# Altium PCB BaseStation.PcbDoc (part 2 of 2)
Units mil, origin at the board's own origin, x right, y up, seen from the top; angles counter-clockwise.
Board outline 2500 x 2500 mil, 4 copper layers (Component Side, Ground Plane, Power Plane, Solder Side), stack 60.8 mil thick; 157 components, 102 nets, 605 pads, 408 vias.
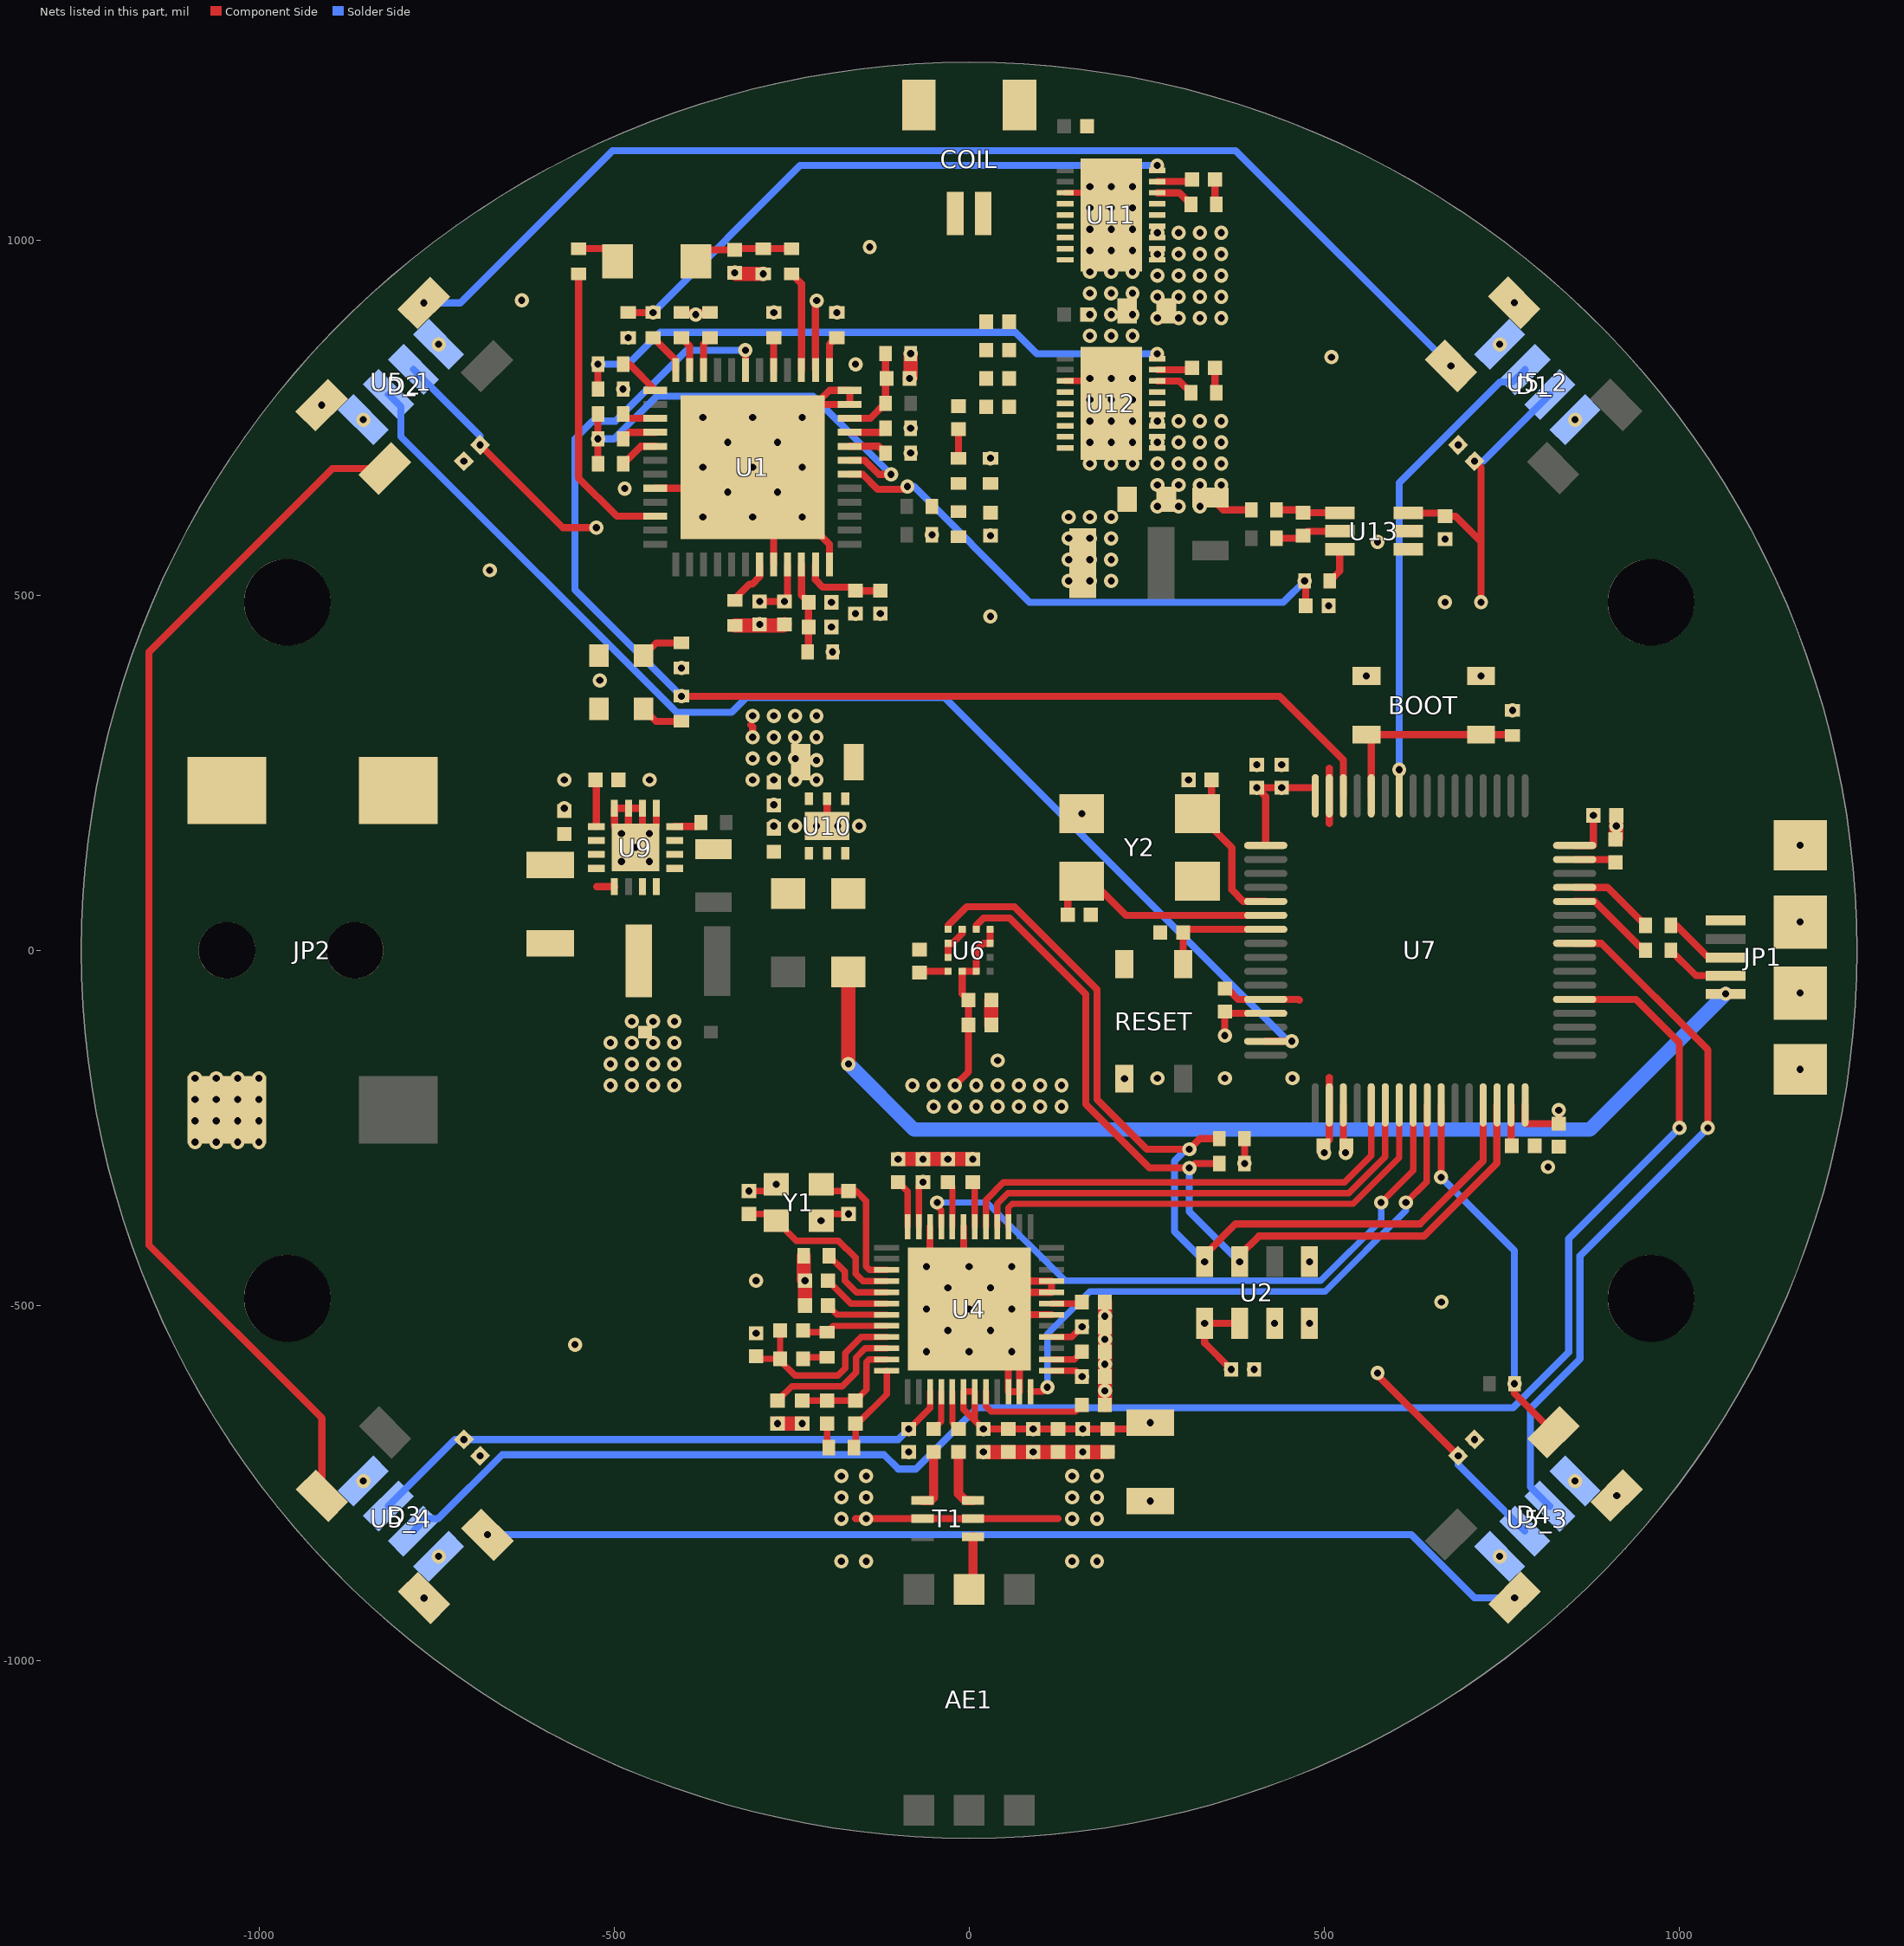
[diagram p4: the nets of this part, all layers, seen from the top]

## Via types
v1: diameter 20, hole 10, Component Side to Solder Side, 408 vias

## Nets (pads, with @x,y where several pads share a name; then routed paths per layer and width w, separated by ;. In a path a pad name is that pad's centre, name@x,y a point inside that pad or via, vN(x,y) a via of type N, cw(c..) or ccw(c..) an arc to the next point about the centre after c; other vN are vias at no path point) (continued)
GND: C1.1 C14.1 C15.2 C16.2 C17.1 C18.1 C19.2 C22.1 C23.1 C24.1 C25.1 C26.1 C27.1 C31.1 C33.1 C34.1 C35.1 C36.1 C37.1 C38.1 C39.1 C40.1 C41.1 C42.1 C43.1 C44_1.1 C44_2.1 C44_3.1 C44_4.1 C45.1 C46.1 C47.1 C48.1 C49.2 C50.2 C51.1 C52.1 C53.1 C54.1 C55.1 C56.1 C57.1 C58.1 C59.1 C60.1 C61.1 C62.1 C63.1 C64.1 C65.2 C69.1 C70.1 C71.1 C73.1 C74.1 C75.1 C79.1 C81.1 C82.2 C84.1 C85.2 C86.2 C87.1 C88.1 COIL.0 D1.3 D2.3 D3.3 D4.3 D9.2 JP1.GND JP1.MT1 JP1.MT2 JP1.P$1 JP1.P$2 JP2.0 JP2.2 pad.0 pad.1 pad.2 pad.3 PWR.C R3.1 R10.1 R21.1 R27.1 R28.2 R29.1 R30.2 R34.2 R39.1 R40.1 R44.1 RESET.3 RESET.4 T1.2 T1.5 U1.20 U1.32 U1.36 U1.47 U1.48 U1.49 U2.3 U2.4 U2.5 U4.22 U4.23 U4.30 U4.32 U4.33 U4.43 U4.46 U4.49 U5_1.1 U5_1.4 U5_2.1 U5_2.4 U5_3.1 U5_3.4 U5_4.1 U5_4.4 U6.2 U6.3 U6.12 U7.12 U7.18 U7.63 U9.5 U9.6 U9.7 U9.8 U9.15 U9.16 U9.17@-469.88,144.84 U10.2 U10.6 U10.7@-200,175 U11.3 U11.9 U12.3 U12.9 U13.1 U13.2 WRLS.C Y1.2 Y2.2 | length 3508.2
  Component Side w9: v1(-310,-338.86) -280.95,-338.86 v1(-271.5,-329.41) ; v1(-208.5,-380.59) -199.05,-371.14 v1(-170,-371.14) ; U4.49@-7.87,-499.21 U4.49@7.87,-514.96 ; U4.49@23.62,-483.46 25.71,-481.38 U4.49@39.37,-467.72 ; U4.49@55.12,-562.2 U4.49@70.87,-577.95 ; U12.3@135.24,801.5 168.5,801.5 U12.9@200,770 ; U11.3@135.24,1066.5 168.5,1066.5 U11.9@200,1035
  Component Side w10: U1.20@-441.81,650.47 -334.53,650.47 U1.49@-306.04,678.96 ; U9.5@-440.35,199.96 -440.35,174.37 v1(-450.2,164.53) U9.17@-460.04,154.69 ; U1.49@-312.87,685.79 U1.49@-306.04,678.96 ; U1.49@-297.13,670.04 U1.49@-306.04,678.96 ; U1.49@-281.38,701.54 U1.49@-265.63,717.28 ; U1.32@-275.47,543.19 U1.49@-275.47,650.47 ; U10.7@-200,175 U10.2@-200,213.39 ; U1.36@-196.73,543.19 -196.73,571.73 v1(-235,610) v1(-270,645) U1.49@-275.47,650.47 ; -160,-800 v1(-145,-800) T1.5@-65.43,-800 T1.2@5.43,-800 125,-800 ; U4.46@-55.12,-388.86 -55.12,-449.88 v1(-30,-475) U4.49@-7.87,-497.13 ; U6.3@-29.53,-9.84 U6.2@-29.53,9.84 -23.81,9.84 -9.84,23.81 U6.12@-9.84,29.53 ; U4.43@-7.87,-388.86 U4.49@-7.87,-497.13 ; U4.49@70.87,-577.95 U4.23@70.87,-621.14 U4.22@55.12,-621.14 55.12,-562.2 55.12,-560.12 v1(30,-535) U4.49@7.87,-512.87 ; U4.30@116.14,-512.87 U4.49@7.87,-512.87 ; C48.1@360,-53.86 363.35,-53.86 378.39,-68.9 U7.12@417.48,-68.9 463.9,-68.9 465,-70 ; C52.1@498.86,-275 507.05,-266.81 U7.18@507.05,-217.52 507.05,-178.75 ; 507.05,178.75 U7.63@507.05,217.52 507.05,256.28 ; U9.17@-479.72,154.69 U9.7@-479.72,199.96 ; U9.17@-479.72,154.69 v1(-489.57,164.53) -499.41,174.37 U9.8@-499.41,199.96 U9.7@-479.72,199.96 ; U9.17@-479.72,154.69 v1(-469.88,144.84) U9.17@-460.04,154.69 ; U9.7@-479.72,199.96 U9.6@-460.04,199.96 U9.17@-460.04,154.69 ; U1.49@-306.04,678.96 v1(-305,680) ; v1(-305,680) U1.49@-275.47,650.47 ; v1(-305,680) v1(-270,715) v1(-235,750) U1.49@-216.42,768.58 ; U1.49@-216.42,768.58 U1.47@-168.19,768.58 U1.48@-168.19,788.27 -196.73,788.27 U1.49@-216.42,768.58 ; U4.49@-7.87,-497.13 v1(0,-505) ; v1(0,-505) U4.49@23.62,-481.38 ; v1(0,-505) U4.49@7.87,-512.87 ; U4.49@23.62,-481.38 25.71,-481.38 U4.32@116.14,-481.38 U4.33@116.14,-465.63 39.37,-465.63 v1(30,-475) U4.49@23.62,-481.38
  Component Side w20: R29.1@-330,457.28 -261.57,457.28 C84.1@-260,458.86 ; v1(-330,953.86) -328.43,952.28 v1(-290,952.28) ; v1(-270,-666.14) v1(-235,-666.14) ; R3.1@-232.72,-430 -232.72,-463.43 v1(-231.14,-465) C24.1@-231.14,-500 ; v1(-100,-293.86) v1(-65,-293.86) v1(-30,-293.86) v1(5,-293.86) ; v1(-83.86,805) -82.28,806.57 v1(-82.28,840) ; v1(20,-706.14) C35.1@55,-706.14 v1(90,-706.14) C37.1@125,-706.14 v1(160,-706.14) C39.1@195,-706.14 ; C47.1@31.14,-105 C46.1@31.14,-70 ; C31.1@191.14,-640 v1(191.14,-620) C43.1@191.14,-600 v1(191.14,-582.5) C22.1@191.14,-565 v1(191.14,-547.5) C42.1@191.14,-530 v1(191.14,-515) C19.2@191.14,-495 ; C56.1@910,156.14 911.14,157.28 v1(911.14,175) C55.1@911.14,190
  other v1: -767.42,-911.67 -180,-860 -145,-860 145,-860 180,-860 -746.97,-853.03 746.97,-853.03 -180,-800 145,-800 180,-800 255,-775.12 -180,-770 -145,-770 145,-770 180,-770 911.67,-767.42 -853.03,-746.97 853.03,-746.97 -180,-740 -145,-740 145,-740 180,-740 -688.59,-711.41 -85,-706.14 711.41,-688.59 401.14,-590 -60,-565 0,-565 60,-565 -555,-555 -300,-539.04 -30,-535 430,-525 479.21,-525 -60,-505 60,-505 665,-495 -300,-465 -60,-445 0,-445 60,-445 479.21,-438.39 815,-305 500,-285 -1090,-270 -1060,-270 -1030,-270 -1000,-270 -1090,-240 -1060,-240 -1030,-240 -1000,-240 -1090,-210 -1060,-210 -1030,-210 -1000,-210 -505,-190 -475,-190 -445,-190 -415,-190 -80,-190 218.66,-180.71 -1090,-180 -1060,-180 -1030,-180 -1000,-180 265,-180 360,-180 455,-180 1170,-167.48 -505,-160 -475,-160 -445,-160 -415,-160 40,-155 -505,-130 -475,-130 -445,-130 -415,-130 -475,-100 -445,-100 -415,-100 1170,-60 1170,40 -489.57,125.16 -450.2,125.16 1170,148 -275,175 -245,175 -215,175 -185,175 -155,175 158.5,192.5 -570,200 -275,205 -570,240 -450,240 308.86,240 405,261.14 440,261.14 765,337.72 -520,380 -193.86,455 -295,458.86 30,470 -125,473.86 506.14,485 -193.86,490 670,490 140,520 170,520 200,520 -675,535 140,550 170,550 200,550 575,575 670,578.86 140,580 170,580 200,580 30,583.86 -52.28,585 -375,610 -305,610 140,610 170,610 200,610 -340,645 -485,650 -375,680 -235,680 170,685 200,685 230,685 -711.41,688.59 -82.28,700 688.59,711.41 -340,715 170,715 200,715 230,715 170,745 200,745 230,745 -853.03,746.97 853.03,746.97 -375,750 -305,750 -911.67,767.42 170,775 200,775 230,775 -487.28,790 170,805 200,805 230,805 -160,825 510,835 -746.97,853.03 746.97,853.03 -480,862.28 170,865 200,865 230,865 170,895 200,895 230,895 -186.17,897.72 767.42,911.67 -630,915 170,925 200,925 230,925 170,955 200,955 230,955 170,985 200,985 230,985 -140,990 170,1015 200,1015 230,1015 170,1045 200,1045 230,1045 170,1075 200,1075 230,1075
I2C.SCL: R6.1 U2.8 U6.1 U7.29 | length 1359.7
  Component Side w10: U6.1@-29.53,29.53 -29.53,35.24 -3.24,61.53 63.47,61.53 180,-55 180,-210 250,-280 v1(310,-280) 325,-265 R6.1@352.28,-265 ; v1(331.57,-438.39) 331.57,-428.43 375,-385 635,-385 723.58,-296.42 U7.29@723.58,-217.52
  Solder Side w10: v1(310,-280) 305.7,-280 289,-296.7 289,-395.81 v1(331.57,-438.39)
I2C.SDA: R7.1 U2.7 U6.11 U7.30 | length 1261.9
  Component Side w10: U6.11@9.84,29.53 9.84,35.24 13.6,39 20.13,45.53 56.84,45.53 164,-61.63 164,-216.63 253.69,-306.31 v1(310,-306.31) v1@311.69,-306.31 ; v1@313.38,-306.31 v1@311.69,-306.31 ; R7.1@352.28,-300 318.01,-300 v1@311.69,-306.31 ; v1(380.79,-438.39) 380.79,-429.21 407.74,-402.26 640.36,-402.26 743.02,-299.61 743.02,-217.77 U7.30@743.27,-217.52
  Solder Side w10: v1(310,-306.31) 310,-367.6 v1(380.79,-438.39)
ISENSE: C69.2 R14.2 U1.42 | length 766.5
  Component Side w10: U1.42@-168.19,670.16 -150.04,670.16 -128.88,649 -91,649 v1(-87,653) ; v1(472.28,520) 473.86,518.43 C69.2@473.86,485
  Solder Side w10: v1(-87,653) -78,653 85,490 442.28,490 v1(472.28,520)
NetAE1_1: AE1.1 T1.1 | length 76.1
  Component Side w13: AE1.1@0,-899.49 5.43,-894.06 T1.1@5.43,-825.59
NetBOOT_1: BOOT.1 BOOT.2 R10.2 U7.60 | length 297.2
  Component Side w10: BOOT.2@557.91,302.28 BOOT.2@559.29,303.66 ; U7.60@566.1,217.52 566.1,296.85 BOOT.2@559.29,303.66 ; R10.2@765,302.28 760,302.28 758.62,303.66 BOOT.1@720.71,303.66 BOOT.2@559.29,303.66
NetC14_2: C14.2 U4.44 | length 65.4
  Component Side w9: C14.2@-30,-326.14 -23.62,-332.52 U4.44@-23.62,-388.86
NetC15_1: C15.1 U4.42 | length 65.7
  Component Side w9: C15.1@5,-326.14 2.87,-328.27 7.87,-333.27 U4.42@7.87,-388.86
NetC16_1: C16.1 U4.48 | length 68.3
  Component Side w9: C16.1@-100,-326.14 -86.61,-339.53 U4.48@-86.61,-388.86
NetC17_2: C17.2 U4.4 Y1.1 | length 246
  Component Side w9: C17.2@-310,-371.14 -280.95,-371.14 Y1.1@-271.5,-380.59 -243.41,-408.67 -184.08,-408.67 -160,-432.75 -160,-455 -149.37,-465.63 U4.4@-116.14,-465.63
NetC18_2: C18.2 U4.3 Y1.3 | length 196.3
  Component Side w9: Y1.3@-208.5,-329.41 -199.05,-338.86 C18.2@-170,-338.86 -158.87,-338.86 -145,-352.73 -145,-445 -140.12,-449.88 U4.3@-116.14,-449.88
NetC19_1: C19.1 U4.31 | length 43.6
  Component Side w9: U4.31@116.14,-497.13 156.73,-497.13 C19.1@158.86,-495
NetC20_1: C20.1 C21.1 C25.2 U4.9 | length 271.6
  Component Side w9: C25.2@-300,-571.14 -296.14,-575 C20.1@-266.14,-575 ; C21.1@-266.14,-535 C20.1@-266.14,-575 ; U4.9@-116.14,-544.37 -151.8,-544.37 -174.36,-566.93 -174.36,-588.15 -184.73,-598.52 -245.27,-598.52 -266.14,-577.64 C20.1@-266.14,-575
NetC20_2: C20.2 R2.1 | length 34.8
  Component Side w9: C20.2@-233.86,-575 -231.57,-572.72 R2.1@-200,-572.72
NetC21_2: C21.2 R2.2 U4.8 | length 122.3
  Component Side w9: C21.2@-233.86,-535 -231.57,-537.28 R2.2@-200,-537.28 -191.34,-528.62 U4.8@-116.14,-528.62
NetC22_2: C22.2 U4.26 | length 47.2
  Component Side w9: U4.26@116.14,-575.87 147.99,-575.87 C22.2@158.86,-565
NetC23_2: C23.2 U4.6 | length 96
  Component Side w9: C23.2@-198.86,-465 -166.73,-497.13 U4.6@-116.14,-497.13
NetC24_2: C24.2 U4.7 | length 88
  Component Side w9: C24.2@-198.86,-500 -185.98,-512.87 U4.7@-116.14,-512.87
NetC26_2: C26.2 U4.10 | length 196.8
  Component Side w9: C26.2@-270,-633.86 -249.66,-613.52 -178.52,-613.52 -159.36,-594.36 -159.36,-573.15 -146.33,-560.12 U4.10@-116.14,-560.12
NetC27_2: C27.2 C28.2 C29.2 U4.11 | length 165.6
  Component Side w9: C27.2@-235,-633.86 C28.2@-200,-633.86 C29.2@-160,-633.86 -144.36,-618.22 -144.36,-579.36 -140.87,-575.87 U4.11@-116.14,-575.87
NetC28_1: C28.1 R4.1 | length 34.8
  Component Side w9: C28.1@-200,-666.14 -200,-697.72 R4.1@-197.72,-700
NetC29_1: C29.1 R4.2 U4.12 | length 129
  Component Side w9: R4.2@-162.28,-700 -160,-697.72 C29.1@-160,-666.14 -157.36,-666.14 -116.14,-624.93 U4.12@-116.14,-591.61
NetC30_1: C30.1 T1.4 | length 81.1
  Component Side w13: T1.4@-65.43,-774.41 -54.41,-774.41 -50,-770 C30.1@-50,-706.14
NetC30_2: C30.2 U4.16 | length 57.1
  Component Side w8.7: C30.2@-50,-673.86 -39.37,-663.23 U4.16@-39.37,-621.14
NetC31_2: C31.2 U4.20 | length 163
  Component Side w9: U4.20@23.62,-621.14 23.62,-641.9 31.08,-649.36 149.5,-649.36 C31.2@158.86,-640
NetC32_1: C32.1 T1.3 | length 83.2
  Component Side w13: C32.1@-15,-706.14 -15,-765 -5.59,-774.41 T1.3@5.43,-774.41
NetC32_2: C32.2 U4.17 | length 56.3
  Component Side w8.7: U4.17@-23.62,-621.14 -23.62,-665.24 C32.2@-15,-673.86
NetC45_2: C45.2 U6.4 | length 41.1
  Component Side w10: C45.2@-70,-31.14 -68.39,-29.53 U6.4@-29.53,-29.53
NetC49_1: C49.1 U7.5 Y2.3 | length 237.4
  Component Side w10: C49.1@341.14,240 341.14,212.14 Y2.3@321.5,192.5 370,144 370,85 386.1,68.9 U7.5@417.48,68.9
NetC50_1: C50.1 U7.6 Y2.1 | length 334.6
  Component Side w10: C50.1@138.86,50 138.86,77.86 Y2.1@158.5,97.5 172.5,97.5 220.79,49.21 U7.6@417.48,49.21
NetC56_2: C56.2 U7.47 | length 59.2
  Component Side w10: U7.47@852.52,127.95 905.91,127.95 C56.2@910,123.86
NetC57_2: C57.2 U7.31 | length 57.9
  Component Side w10: U7.31@762.95,-217.52 762.95,-274.09 C57.2@763.86,-275
NetC58_2: C58.2 RESET.1 U7.7 | length 162.6
  Component Side w10: RESET.1@301.34,-19.29 301.14,-19.09 C58.2@301.14,25 305.67,29.53 U7.7@417.48,29.53
NetC62_2: C62.2 U9.9 | length 66.1
  Component Side w10: C62.2@-526.14,240 -525,238.86 U9.9@-525,174.37
NetC63_2: C63.2 D10.1 D11.1 U10.4 U10.5
NetC66_1: C66.1 R15.2 | length 35.7
  Component Side w10: C66.1@346.14,1085 346.14,1051.57 R15.2@347.72,1050
NetC66_2: C66.2 U11.7 | length 50.2
  Component Side w10: U11.7@264.76,1082.24 311.1,1082.24 C66.2@313.86,1085
NetC67_1: C67.1 U12.7 | length 50.2
  Component Side w10: U12.7@264.76,817.24 311.1,817.24 C67.1@313.86,820
NetC67_2: C67.2 R16.1 | length 35.7
  Component Side w10: C67.2@346.14,820 346.14,786.57 R16.1@347.72,785
NetC68_1: C68.1 R18.2 U13.4 | length 90.9
  Component Side w10: R18.2@432.72,620 466.14,620 C68.1@470,616.14 521.22,616.14 U13.4@521.77,615.59
NetC68_2: C68.2 R13.2 U13.5 | length 93.2
  Component Side w10: R13.2@432.72,580 466.14,580 C68.2@470,583.86 476.14,590 U13.5@521.77,590
NetC72_1: C72.1 C76.1 C77.1 C78.1 C80.2 COIL.2
NetC72_2: C72.2 C76.2 C77.2 C78.2 U12.4
NetC74_2: C74.2 C75.2 R17.1 R18.1 U11.5 U12.5 | length 64.5
  Component Side w10: R17.1@340,637.4 357.4,620 R18.1@397.28,620
  other v1: 265,625 295,625 325,625 265,655 295,655 325,655 355,655 265,685 295,685 325,685 355,685 265,715 295,715 325,715 355,715 265,745 295,745 325,745 355,745 265,890 295,890 325,890 355,890 265,920 295,920 325,920 355,920 265,950 295,950 325,950 355,950 265,980 295,980 325,980 355,980 265,1010 295,1010 325,1010 355,1010
NetC79_2: C79.2 D13.1 R20.1 R21.2 | length 142.2
  Component Side w10: D13.1@-384.88,970 -368.74,986.14 C79.2@-330,986.14 -328.43,987.72 R21.2@-290,987.72 R20.1@-250,987.72
NetC80_1: C80.1 R23.2 | length 41.1
  Component Side w10: R23.2@-15,692.72 C80.1@-15,733.86
NetC82_1: C82.1 C85.1 R22.2 U1.34 | length 128
  Component Side w10: U1.34@-236.1,543.19 -236.1,499.96 C85.1@-226.14,490 C82.1@-226.14,455 -226.14,421.57 R22.2@-227.72,420
NetC83_1: C83.1 C86.1 U1.35 | length 120.2
  Component Side w10: U1.35@-216.42,543.19 -216.42,521.42 -206.24,511.24 -165.09,511.24 C83.1@-160,506.14 ; C83.1@-160,506.78 C83.1@-160,506.14 ; C86.1@-125,506.14 C83.1@-160,506.14
NetC87_2: C87.2 R23.1 R24.1 R25.2 R27.2
NetC88_2: C88.2 R33.2 R34.1 U1.46 | length 129.2
  Component Side w10: U1.46@-168.19,748.9 -139.06,748.9 -117.96,770 R33.2@-117.72,770 R34.1@-117.72,840
NetD1_4: D1.4 D2.2 | length 1672
  Solder Side w8: 670,830 677.42,822.58 v1(678.33,822.58)
  Solder Side w10: v1(-767.8,911.28) -716.76,911.28 -502.28,1125.76 375.14,1125.76 v1(678.33,822.58)
NetD2_4: D2.4 D3.2 | length 1728.2
  Component Side w10: D3.2@-911.28,-767.8 -911.28,-658.72 -1155,-415 -1155,420 -896.67,678.33 D2.4@-822.58,678.33
NetD3_4: D3.4 D4.2 | length 1486.3
  Component Side w10: v1(-678.33,-822.58) D3.4@-675.9,-825
  Solder Side w10: v1(-678.33,-822.58) 622.58,-822.58 711.28,-911.28 v1(767.8,-911.28)
NetD4_4: D4.4 R5.1 U7.26 | length 526.3
  Component Side w10: v1(664.53,-319.53) U7.26@664.53,-217.52 ; v1(767.72,-610) 767.72,-623.47 D4.4@822.58,-678.33
  Solder Side w10: v1(664.53,-319.53) 767.72,-422.72 v1(767.72,-610)
NetD12_A: PWR.A R12.1 | length 60.8
  Component Side w10: PWR.A@-458.5,415 -440.79,432.72 R12.1@-405,432.72
NetD13_2: D13.2 R19.2 | length 62.2
  Component Side w10: R19.2@-550,987.72 -512.83,987.72 D13.2@-495.12,970
NetD14_A: R37.1 WRLS.A | length 60.8
  Component Side w10: WRLS.A@-458.5,340 -440.79,322.28 R37.1@-405,322.28
NetJP3_1: COIL.1 U11.4
NetL4_1: L4.1 U9.1 U9.2 U9.3
NetL5_1: L5.1 U10.1
NetR3_2: R3.2 U4.5 | length 109.9
  Component Side w9: R3.2@-197.28,-430 -175,-452.28 -175,-465 -158.62,-481.38 U4.5@-116.14,-481.38
NetR8_2: R8.2 U7.44 | length 128.3
  Component Side w10: U7.44@852.52,68.9 880.94,68.9 949.84,0 R8.2@952.28,0
NetR9_2: R9.2 U7.45 | length 122
  Component Side w10: U7.45@852.52,88.58 898.7,88.58 R9.2@952.28,35
NetR11_1: R11.1 U9.4 | length 39.4
  Component Side w10: U9.4@-414.76,174.37 -383.35,174.37 R11.1@-377.72,180
NetR14_1: R14.1 U13.6 | length 50.2
  Component Side w10: R14.1@507.72,520 521.77,534.06 U13.6@521.77,564.41
NetR15_1: R15.1 U11.6 | length 54.2
  Component Side w10: U11.6@264.76,1066.24 296.04,1066.24 R15.1@312.28,1050
NetR16_2: R16.2 U12.6 | length 54.2
  Component Side w10: U12.6@264.76,801.24 296.04,801.24 R16.2@312.28,785
NetR26_2: R26.2 U1.5 | length 45.7
  Component Side w10: U1.5@-275.47,816.81 -275.47,861.81 R26.2@-275,862.28
NetR29_2: R29.2 U1.31 | length 67.4
  Component Side w10: R29.2@-330,492.72 -330,495 -309.54,515.46 -305.36,515.46 -295.16,525.66 U1.31@-295.16,543.19
NetR30_1: R30.1 U1.1 | length 48.4
  Component Side w10: U1.1@-196.73,816.81 -196.73,853.27 R30.1@-190,860 ; R30.1@-187.91,860.55 R30.1@-186.17,862.28
NetR31_1: R31.1 U1.11 | length 50.2
  Component Side w10: R31.1@-405,862.28 -393.58,850.87 U1.11@-393.58,816.81
NetR32_1: R32.1 U1.10 | length 49.2
  Component Side w10: U1.10@-373.9,816.81 -373.9,853.39 R32.1@-365,862.28
NetR35_1: R35.1 U1.45 | length 52.9
  Component Side w10: U1.45@-168.19,729.21 -123.5,729.21 R35.1@-117.72,735
NetR36_1: R36.1 U1.12 | length 58.6
  Component Side w10: R36.1@-445,862.28 -413.27,830.55 U1.12@-413.27,816.81
NetR37_2: R37.2 U1.7 U7.62 | length 1763.8
  Component Side w10: v1(-405,357.72) 437.28,357.72 526.73,268.27 U7.62@526.73,217.52 ; v1(-315,844.68) -314.84,844.84 U1.7@-314.84,816.81
  Solder Side w10: v1(-405,357.72) -555,507.72 -555,720 -530,745 -497.63,745 -397.94,844.68 v1(-315,844.68)
NetR38_1: R38.1 U1.13 | length 60.7
  Component Side w10: R38.1@-487.28,825 -478.54,825 U1.13@-441.81,788.27
NetR41_1: R41.1 R42.1 R43.1 U1.43 | length 609.5
  Component Side w10: R41.1@-522.72,685 v1(-522.72,720) R43.1@-522.72,745 ; U1.43@-168.19,689.84 -147.09,689.84 -127.25,670 v1(-110,670)
  Solder Side w10: v1(-522.72,720) -500,720 -440,780 -220,780 v1(-110,670)
NetR41_2: R41.2 U1.17 | length 55.6
  Component Side w10: R41.2@-487.28,685 -487.04,685 -462.51,709.53 U1.17@-441.81,709.53
NetR42_2: R42.2 U1.16 | length 49.3
  Component Side w10: R42.2@-487.28,720 -478.07,729.21 U1.16@-441.81,729.21
NetR43_2: R43.2 U1.15 | length 48
  Component Side w10: R43.2@-487.28,755 -481.18,748.9 U1.15@-441.81,748.9
NetR44_2: R44.2 U1.44 | length 54.4
  Component Side w10: U1.44@-168.19,709.53 -127.24,709.53 R44.2@-117.72,700
NetU4_45: U4.45 U7.24 | length 923.1
  Component Side w9: v1(-45,-355) -45,-360 -39.37,-365.63 U4.45@-39.37,-388.86 ; v1(580,-355) 625.16,-309.84 U7.24@625.16,-217.52
  Solder Side w9: v1(-45,-355) 25,-355 135,-465 495,-465 580,-380 v1(580,-355)
NetU5_1_3: U5_1.3 U7.15 | length 1727.6
  Component Side w10: U7.15@417.48,-127.95 v1(454.21,-127.95)
  Solder Side w10: U5_1.3@-817.4,782.6 -800,765.2 -800,723.02 -411.98,335 -334.7,335 -313.7,356 -34.7,356 449.25,-127.95 v1(454.21,-127.95)
NetU5_2_3: U5_2.3 U7.58 | length 646.9
  Solder Side w10: v1(605.47,254.25) 605.47,658 747.47,800 765.2,800 U5_2.3@782.6,817.4
NetU5_3_3: U5_3.3 U7.41 | length 1007.1
  Component Side w10: U7.41@852.52,9.84 890.16,9.84 1040,-140 v1(1040,-250)
  Solder Side w10: U5_3.3@817.4,-782.6 790,-755.2 790,-645 860,-575 860,-430 v1(1040,-250)
NetU5_4_3: U5_4.3 U7.37 | length 2420.6
  Component Side w10: U7.37@852.52,-68.9 938.9,-68.9 1000,-130 v1(1000,-250)
  Solder Side w10: U5_4.3@-782.6,-817.4 -765.2,-800 -747.47,-800 -657.47,-710 -120,-710 -100,-730 -75,-730 11.12,-643.88 766.01,-643.88 844,-565.89 844,-406 v1(1000,-250)
PWM_A: R36.2 R40.2 U11.8 | length 830.5
  Component Side w10: R40.2@-480,897.72 v1(-445,897.72)
  Solder Side w10: v1(-445,897.72) -237.95,1104.76 v1(264.76,1104.76)
PWM_B: R38.2 R39.2 U12.8 | length 853.6
  Component Side w10: R39.2@-522.72,790 v1(-522.72,825)
  Solder Side w10: v1(-522.72,825) -480,825 -435,870 65,870 95.24,839.76 v1(264.76,839.76)
SNOOZE_CAP: R20.2 U1.3 | length 141.2
  Component Side w10: R20.2@-250,952.28 -236.1,938.39 U1.3@-236.1,816.81
SNOOZE_CHG: R19.1 U1.22 | length 417.8
  Component Side w10: R19.1@-550,952.28 -550,665 -496.1,611.1 U1.22@-441.81,611.1
SPI.CS: U4.24 U7.25 | length 839
  Component Side w9: U4.24@86.61,-621.14 103.86,-621.14 v1(110,-615) ; v1(615,-355) 644.03,-325.97 644.03,-218.33 U7.25@644.84,-217.52
  Solder Side w9: v1(110,-615) 110,-540 170,-480 501.21,-480 615,-366.21 v1(615,-355)
SPI.MISO: U4.40 U7.22 | length 678.8
  Component Side w9: U4.40@39.37,-388.86 39.37,-356.84 54.4,-341.81 534.4,-341.81 585.79,-290.43 U7.22@585.79,-217.52
SPI.MOSI: U4.39 U7.23 | length 680.5
  Component Side w9: U4.39@55.12,-388.86 55.12,-362.31 60.61,-356.81 540.61,-356.81 605.47,-291.95 U7.23@605.47,-217.52
SPI.SCK: U4.41 U7.21 | length 677.2
  Component Side w9: U4.41@23.62,-388.86 23.62,-351.38 48.19,-326.81 528.19,-326.81 566.1,-288.9 U7.21@566.1,-217.52
USB.DM: JP1.D- R8.1 | length 92
  Component Side w10: R8.1@987.72,0 1023.31,-35.59 JP1.D-@1065,-35.59
USB.DP: JP1.D+ R9.1 | length 95.9
  Component Side w10: R9.1@987.72,35 995.44,35 1040.44,-10 JP1.D+@1065,-10
VCC: BOOT.3 BOOT.4 C1.2 C33.2 C34.2 C35.2 C36.2 C37.2 C38.2 C39.2 C40.2 C41.2 C42.2 C43.2 C44_1.2 C44_2.2 C44_3.2 C44_4.2 C46.2 C47.2 C48.2 C51.2 C52.2 C53.2 C54.2 C55.2 C64.2 C73.2 C81.2 C83.2 C84.2 L5.2 R6.2 R7.2 R12.2 R22.1 R24.2 R26.1 R31.2 R32.2 R35.2 U1.2 U1.33 U2.1 U2.2 U4.15 U4.18 U4.19 U4.25 U4.28 U4.47 U5_1.2 U5_2.2 U5_3.2 U5_4.2 U6.5 U6.6 U6.9 U6.10 U7.1 U7.13 U7.19 U7.32 U7.48 U7.64 U10.3 U13.3 | length 3676.9
  Component Side w9: v1(-85,-673.86) -55.12,-643.98 U4.15@-55.12,-621.14 ; U4.47@-70.87,-388.86 -70.87,-332.01 v1(-65,-326.14) ; v1(20,-673.86) 7.87,-661.73 ; U4.25@116.14,-591.61 150.47,-591.61 v1(158.86,-600) ; U4.28@116.14,-544.37 144.49,-544.37 v1(158.86,-530) ; 7.87,-661.73 U4.19@7.87,-621.14 U4.18@-7.87,-621.14 -7.87,-645.98 7.87,-661.73
  Component Side w10: v1(-688.59,711.41) -572.17,595 v1(-525,595) ; R31.2@-405,897.72 -387.72,897.72 v1(-385,895) -382.28,897.72 R32.2@-365,897.72 ; -307.28,317.28 -305,315 v1(-305,300) ; v1(-295,491.14) v1(-260,491.14) -255.79,495.35 U1.33@-255.79,543.19 ; U1.2@-216.42,816.81 -216.42,916.42 v1(-214.57,914.57) v1@-213.83,914.57 ; v1(-20,-190) -1.14,-171.14 C47.2@-1.14,-105 C46.2@-1.14,-70 -9.84,-61.3 U6.5@-9.84,-29.53 U6.6@9.84,-29.53 9.84,-0.16 19.84,9.84 U6.9@29.53,9.84 U6.10@29.53,29.53 ; v1(20,-673.86) C35.2@55,-673.86 v1(90,-673.86) C37.2@125,-673.86 v1(160,-673.86) C39.2@195,-673.86 246.02,-673.86 v1(255,-664.88) ; v1(360,-120) C48.2@360,-86.14 362.44,-88.58 U7.13@417.48,-88.58 ; v1(368.86,-590) 331.57,-552.72 v1(331.57,-525) U2.2@380.79,-525 ; v1(387.72,-300) R6.2@387.72,-265 R6.2@387.72,-260 ; U7.1@417.48,147.64 417.48,216.38 v1(405,228.86) v1(440,228.86) 487.36,228.86 U7.64@487.36,217.52 ; U7.19@526.73,-217.52 526.73,-270.59 C52.2@531.14,-275 ; v1(575,-595) 572.17,-595 v1(688.59,-711.41) ; U13.3@618.23,615.59 665.55,615.59 C73.2@670,611.14 684.57,611.14 720.71,575 ; v1(711.41,688.59) 720.71,679.29 720.71,575 ; v1(720.71,490) 720.71,575 ; U7.32@782.64,-217.52 782.64,-242.64 783.86,-243.86 C51.2@830,-243.86 v1(830,-225) ; U7.48@852.52,147.64 878.86,147.64 v1(878.86,190)
  Solder Side w10: U5_4.2@-817.68,-782.32 -723.94,-688.59 v1(-711.41,-688.59) -99.73,-688.59 v1(-85,-673.86) ; U5_1.2@-782.32,817.68 -688.59,723.94 v1(-688.59,711.41) ; v1(688.59,-711.41) 688.59,-723.94 U5_3.2@782.32,-817.68 ; v1(711.41,688.59) 723.94,688.59 U5_2.2@817.68,782.32
  other v1: 530,-285 -50,-220 -20,-220 10,-220 40,-220 70,-220 100,-220 130,-220 -50,-190 10,-190 40,-190 70,-190 100,-190 130,-190 -305,240 -275,240 -245,240 -215,240 -215,267.5 -305,270 -275,270 -245,270 -275,300 -245,300 -215,300 -305,330 -275,330 -245,330 -215,330 559.29,386.34 720.71,386.34 -405,397.28 -192.28,420 -160,473.86 30,692.72 -82.28,735 -275,897.72
VDD: C59.2 C60.2 JP2.1 U9.10 U9.11 U9.12 U9.13 | length 25.3
  Component Side w10: -524.72,89.72 U9.13@-499.41,89.72
VUSB: D11.2 JP1.VBUS | length 1482.4
  Component Side w20: v1(-170,-160) D11.2@-170,-30.12
  Solder Side w20: v1(-170,-160) -77.54,-252.46 873.72,-252.46 v1(1065,-61.18)
pads on no net: AE1.2 D1.2 JP1.ID JP2.3 RESET.2 T1.6 U1.4 U1.6 U1.8 U1.9 U1.14 U1.18 U1.19 U1.21 U1.23 U1.24 U1.25 U1.26 U1.27 U1.28 U1.29 U1.30 U1.41 U2.6 U4.1 U4.2 U4.13 U4.14 U4.21 U4.27 U4.29 U4.34 U4.35 U4.36 U4.37 U4.38 U4.Paste1 U4.Paste2 U4.Paste3 U4.Paste4 U4.Paste5 U4.Paste6 U4.Paste7 U4.Paste8 U4.Paste9 U6.7 U6.8 U7.2 U7.3 U7.4 U7.8 U7.9 U7.10 U7.11 U7.14 U7.16 U7.17 U7.20 U7.27 U7.28 U7.33 U7.34 U7.35 U7.36 U7.38 U7.39 U7.40 U7.42 U7.43 U7.46 U7.49 U7.50 U7.51 U7.52 U7.53 U7.54 U7.55 U7.56 U7.57 U7.59 U7.61 U9.17@-469.88,144.84 U10.7@-182.28,175 U10.7@-217.72,175

## Polygon pours and split planes (outlines as drawn)
VCC on Solder Side "Top Layer-No Net" (solid, pour order 0): -395,360 -55,360 190,115 190,-235 -60,-235 -395,100
GND on Solder Side "Top Layer-No Net" (solid, remove dead copper, pour order 4): -1250,-1250 1250,-1250 1250,1250 -1250,1250
GND on Component Side "Top Layer-No Net" (solid, remove dead copper, pour order 2): -1250,-1250 1250,-1250 1250,1250 -1250,1250
GND on Ground Plane (split plane): 231 vertices, not listed, extent -1229.99,-1028.91 1229.99,1229.99
NetC74_2 on Power Plane (split plane): 247.6,1204.82 278.04,1198.16 308.3,1190.73 338.37,1182.54 368.22,1173.59 379.9,1169.76 379.9,647.11 342.89,610.1 257.11,610.1 240.1,627.11 240.1,1206.26
VCC on Power Plane (split plane): 1130.32,485.06 1142.24,456.27 1153.43,427.18 1163.89,397.83 1173.59,368.22 1182.54,338.37 1190.73,308.3 1198.16,278.04 1204.82,247.6 1210.71,217 1215.81,186.26 1220.14,155.4 1223.69,124.44 1226.45,93.4 1228.42,62.3 1229.6,31.16 1229.99,0.86 1229.9,0 1229.99,-0.86 1229.6,-31.16 1228.42,-62.3 1226.45,-93.4 1223.69,-124.44 1220.14,-155.4 1215.81,-186.26 1210.71,-217 1204.82,-247.6 1198.16,-278.04 1190.73,-308.3 1182.54,-338.37 1177.58,-354.9 875,-354.9 873.05,-355.29 871.4,-356.4 532.89,-694.9 -97.89,-694.9 -199.9,-592.89 -199.9,-317.11 -52.89,-170.1 220,-170.1 221.95,-169.71 223.6,-168.6 343.6,-48.6 344.71,-46.95 345.1,-45 345.1,227.89 627.11,509.9 1119.28,509.9
VCC on Power Plane (split plane): 31.16,1229.6 54.9,1228.7 54.9,627.11 -168.6,403.6 -169.71,401.95 -170.1,400 -170.1,262.11 -207.11,225.1 -392.89,225.1 -554.9,387.11 -554.9,1097.61 -541.68,1104.3 -513.54,1117.67 -485.06,1130.32 -456.27,1142.24 -427.18,1153.43 -397.83,1163.89 -368.22,1173.59 -338.37,1182.54 -308.3,1190.73 -278.04,1198.16 -247.6,1204.82 -217,1210.71 -186.26,1215.81 -155.4,1220.14 -124.44,1223.69 -93.4,1226.45 -62.3,1228.42 -31.16,1229.6 -0.86,1229.99 0,1229.9 0.86,1229.99
5V on Power Plane (split plane): 213 vertices, not listed, extent -1229.99,-1028.91 1174.53,1228.24

## Keep-outs
Keep-Out Layer:
  circle w10: c0,0 r1250

## Other copper
Component Side:
  region net NetC72_1: -50,750 35,750 35,965 -5,1005 -5,1075 -50,1075
  region net NetJP3_1: 5,1075 95,1075 115.32,1054.69 147.83,1054.69 147.83,957.17 150,955 55,955 5,1005
  region net NetC72_2: 45,945 110,945 110,800 120.31,789.68 147.83,789.68 147.83,697.83 92.17,697.83 45,745
  region net NetC87_2: 45,605 45,670 -35,670 -65,640 -65,605
  region net 5V: 220,600 355,600 375,580 375,485 220,485
  region net NetC74_2: 252.17,789.68 275.31,789.68 300,765 370,765 370,625 355,610 252.17,610
  region net NetC74_2: 252.17,1054.69 275.31,1054.68 300,1030 370,1030 370,875 252.17,875
  region net 5V: -395,100 -340,100 -275,35 -215,35 -215,-175 -395,-175
  region net GND: -465,100 -405,100 -405,-175 -491.82,-175 -491.82,48.18 -465,75
  region net NetL4_1: -425,160 -325,160 -325,110 -425,110
  region net VCC: -320,225 -265,225 -245,205 -215,205 -215,230 -200,230 -200,345 -320,345
  region net NetL5_1: -185,205 -165,205 -140,230 -140,300 -185,300
  region net GND: -300,215 -265,215 -245,195 -150,195 -150,125 -185,125 -185,150 -190,155 -300,155
  region net NetC63_2: -275,50 -290,65 -290,145 -195,145 -195,125 -185,115 -135,115 -135,50
  region net VDD: -1125,300 -710,300 -590,180 -560,180 -540,160 -510,160 -510,70 -1125,70
  region net GND: 156.14,1185 245,1185 245,609.28 156.14,609.28
  region net GND: 125,480 205,480 205,620 125,620
  region net GND: -1120,-285 -970,-285 -970,-160 -1120,-160
  region net GND: -640,-25 -540,-25 -540,50 -640,50
  pour cut-out: -125,-1225 -125,-740 -125,-681.78 -83.22,-640 10,-640 10,-700 125,-815 125,-1225
  pour cut-out: -690,-1045 -530,-885 530,-885 690,-1045 690,-1315 -690,-1315
Solder Side:
  pour cut-out: -690,-1045 -530,-885 530,-885 690,-1045 690,-1315 -690,-1315
Ground Plane (plane layer: these items are gaps in the copper):
  pour cut-out: -690,-1045 -530,-885 530,-885 690,-1045 690,-1315 -690,-1315
  lines w10: -65,455 -64.8,455 55.2,575 55.2,1250
Power Plane (plane layer: these items are gaps in the copper):
  pour cut-out: -690,-1045 -530,-885 530,-885 690,-1045 690,-1315 -690,-1315
  lines w10: -560,1120 -560,385 -395,220 -325,220 ; -330,220 -205,220 -165,260 -165,400 60,625 60,1250 ; 245,1230 235,1220 235,625 255,605 345,605 385,645 385,1185 380,1190 ; 1135,515 625,515 340,230 340,-45 220,-165 -55,-165 -205,-315 -205,-595 -100,-700 535,-700 875,-360 1200,-360

## Silkscreen, mask and mechanical layers (free items; w line width, h text height)
Top Overlay:
  lines w10: 0,-1105 0,-1055 ; 0,-1005 0,-1055 ; 0,-1055 50,-1005 -50,-1005 0,-1055
  text "thingystation v1.0 / Raphael Chang" at -585,-1025 h20
Bottom Overlay:
  text "thingystation" at 700,-60 h300